# Altium PCB PCB.PcbDoc
Units mm, origin at the board's own origin, x right, y up, seen from the top; angles counter-clockwise.
Board outline 88.52 x 32.13 mm, 2 copper layers (Top Layer, Bottom Layer); 48 components, 54 nets, 209 pads, 13 vias.
Unrouted connection lines stored in the file: 85.
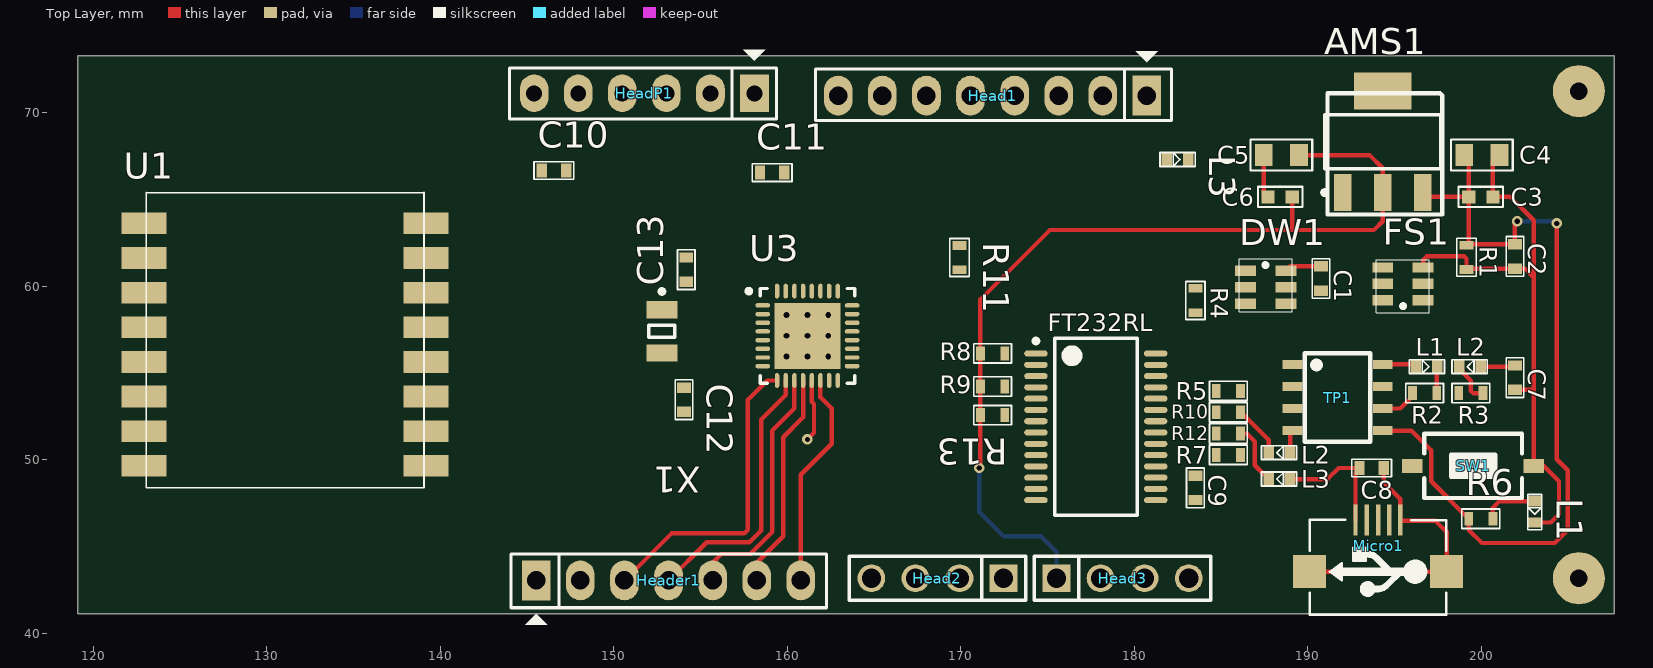
[diagram p0: Top Layer view]
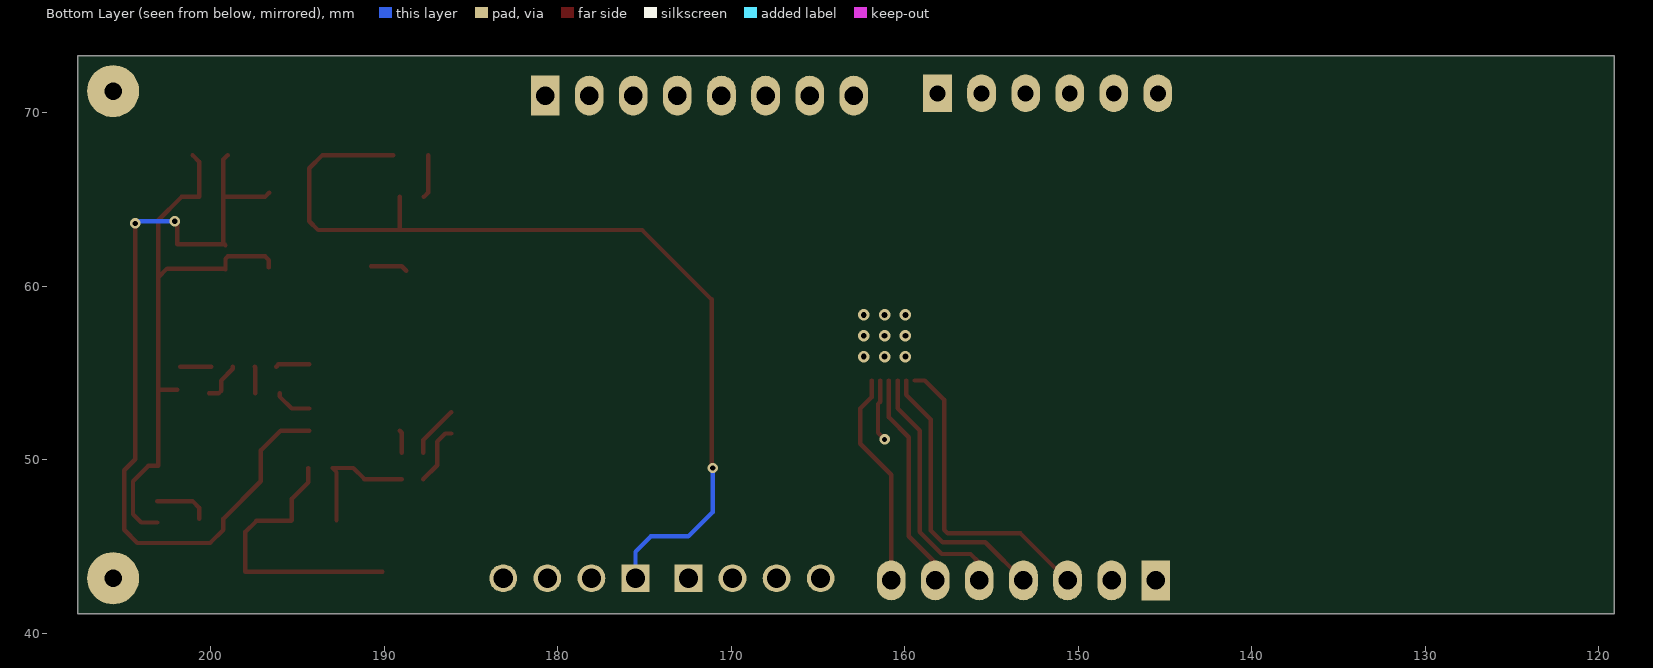
[diagram p1: Bottom Layer view, seen from below]

## Layer stack, top to bottom
Top Solder: solder mask 0.0102, Solder Resist, Dk 3.5
Top Layer: signal copper 0.0356
Dielectric 1: dielectric 0.32, FR-4, Dk 4.8
Bottom Layer: signal copper 0.0356
Bottom Solder: solder mask 0.0102, Solder Resist, Dk 3.5

## Board outline
119.126,41.148 207.645,41.148 207.645,73.279 119.126,73.279

## Design rules (kind name [scope] priority, off if disabled: settings)
Clearance [All] p1: gap=0.254 ignorepadtopadclearanceinfootprint=FALSE
PolygonConnect [All] p1: connectstyle=Relief reliefconductorwidth=0.254 reliefentries=4 polygonreliefangle="90 Angle" airgapwidth=0.254
RoomDefinition Schematic [InComponentClass('Schematic')] p1: confinementstyle=ConfineIn formatcopy=TRUE lockcomponents=FALSE outline 0,0 50.8,0 50.8,25.4 0,25.4
RoutingVias Via [All] p1: holewidth=0.3 width=0.6 viastyle="Through Hole" minholewidth=0.3 minwidth=0.6 maxholewidth=0.3 maxwidth=0.6
SolderMaskExpansion [All] p1: expansion=0.102
Width [All] p1: maxlimit=0.254 minlimit=0.254 preferedwidth=0.254
30 further rules are at their usual default settings.

## Components (designator, comment, footprint, x,y, rotation, side; value= is the part's Value field where it differs from the comment)
AMS1 "AMS1117 3.3V" AMS-1117 194.437,67.564 r0 top
Baterry1 "18650 Baterry" "18650 Baterry" 230.505,86.614 r270 bottom
C1 "100pF" "C104 0603 SMD" 190.754,60.452 r270 top
C2 "100pF" "C104 0603 SMD" 201.93,61.722 r90 top
C3 "2u2" 0603C-2U2 199.263,65.151 r0 top
C4 "2u2" 0805C-TBD 199.263,67.564 r0 top
C5 "2u2" 0805C-TBD 189.23,67.564 r180 top
C6 "2u2" 0603C-2U2 189.103,65.151 r180 top
C7 "100pF" "C104 0603 SMD" 201.93,54.737 r90 top
C8 "4.7uF" "C104 0603 SMD" 193.675,49.53 r0 top
C9 "4.7uF" "C104 0603 SMD" 183.515,48.387 r90 top
C10 "0.1uF" "C104 0603 SMD" 146.558,66.675 r0 top
C11 "0.1uF" "C104 0603 SMD" 159.131,66.548 r0 top
C12 "100pF" "C104 0603 SMD" 154.051,53.467 r270 top
C13 "100pF" "C104 0603 SMD" 154.178,60.96 r90 top
DW1 "DW01A" SOT23-6L 187.579,60.198 r0 top
FS1 "FS8250A" SOT23-6L 195.46,59.887 r180 top
FT232RL "FT232RL" TSSOP28 177.779,51.902 r0 top
Head1 "JP8 PIN" JP8 180.721,70.993 r180 top value=JP7
Head2 "JP4" JP4-D1T 172.466,43.18 r180 top
Head3 "JP4" JP4-D1T 175.514,43.18 r0 top
Header1 "JP7 PIN" JP7 145.542,43.053 r0 top value=JP7
HeadP1 "JP6 PIN" JP6 158.115,71.12 r180 top value=JP7
L1 "Red" "LED 0603 SMD" 203.073,46.99 r270 top
L1 "Red" "LED 0603 SMD" 196.85,55.372 r0 top
L2 "Red" "LED 0603 SMD" 188.341,50.419 r180 top
L2 "Red" "LED 0603 SMD" 199.314,55.372 r180 top
L3 "Red" "LED 0603 SMD" 188.341,48.895 r180 top
L3 "Red" "LED 0603 SMD" 182.499,67.31 r0 top
Micro1 "USB-5" USB-M1 194.043,46.529 r180 top
R1 "0.1K" "SMD 0603 Res" 199.136,61.671 r270 top
R2 "1K" "SMD 0603 Res" 196.723,53.848 r0 top
R3 "1K" "SMD 0603 Res" 199.39,53.848 r0 top
R4 "1K" "SMD 0603 Res" 183.515,59.182 r270 top
R5 "1.3K" "SMD 0603 Res" 185.42,53.975 r0 top
R6 "0.51k" "SMD 0603 Res" 199.96,46.609 r0 top
R7 "0.22k" "SMD 0603 Res" 185.42,50.292 r180 top
R8 "10K" "SMD 0603 Res" 171.831,56.134 r180 top
R9 "10K" "SMD 0603 Res" 171.831,54.229 r180 top
R10 "0.51K" "SMD 0603 Res" 185.42,52.747 r180 top
R11 "1K" "SMD 0603 Res" 169.926,61.657 r270 top
R12 "0.51K" "SMD 0603 Res" 185.42,51.52 r180 top
R13 "10K" "SMD 0603 Res" 171.831,52.578 r180 top
SW1 "SW" SW1-SMD 199.517,49.657 r180 top value="SW chip 2 pin"
TP1 "TP4056" TP4056-SOP8 189.103,50.419 r270 top
U1 "Lora Ra-02" Ra-02 131.064,56.896 r0 top
U3 "ATmega328-AU" QFN32 161.163,57.15 r0 top
X1 "8Mhz" XT2-32.768KHz-2_V 152.781,57.404 r270 top value=4Mhz

## Footprints (in the part's own frame and the unit in brackets; to place one, negate y for a bottom-side part, rotate by r counter-clockwise, add the part's x,y. Pads: shape width x height; smd on the part's side, far side on the other; paste and mask are expansions set on the pad)
0603C-2U2 [mil] "CAPACITOR 0603"
  rect 30x30 smd: 1(0,0) 2(55,0)
  silkscreen extent -23,-23 78,23, body extent -4,-15 59,15, height 19
0805C-TBD [mil] "CAPACITOR 0805"
  rect 40x50 smd: 1(-10,0) 2(70,0)
  silkscreen extent -40,-35 100,35, body extent -11,-25 70,25, height 26
"18650 Baterry" [mm]
  rect 8x6 smd: 1(-0.254,10.287) 2(76.962,10.287)
  silkscreen extent -4.32,0 81.03,20.7, body extent 0,0 77.05,20.65, height 14.86
AMS-1117 [mm]
  rect 1x2.15 smd: 1(-2.427,-2.163) 2(-0.127,-2.163) 3(2.173,-2.163)
  rect 3.3x2.15 smd: 4(-0.127,3.687)
  silkscreen extent -3.6,-3.43 3.3,3.56, body extent -3.37,-2.74 3.19,4.26, height 2.04
"C104 0603 SMD" [mm]
  rect 0.6x0.8 smd: 1(-0.7,0) 2(0.7,0)
  silkscreen extent -1.14,-0.51 1.14,0.51, body extent -0.8,-0.4 0.8,0.4
JP4-D1T [mm] "4 pins, 1 row, straight, gold plating"
  rect 1.6x1.6 hole 1.1: 1(0,0)
  round 1.6 hole 1.1: 2(2.54,0) 3(5.08,0) 4(7.62,0)
  silkscreen extent -1.27,-1.27 8.89,1.27, body extent -1.27,-1.27 8.89,1.27, height 8.54
JP6 [mil] "JP6"
  rect 65x85 hole 36: 1(0,0)
  oval 65x85 hole 36: 2(100,0) 3(200,0) 4(300,0) 5(400,0) 6(500,0)
  silkscreen extent -50,-99 556,58, body extent -48,-50 548,48, height 323
JP7 [mil] "JP7"
  rect 65x90 hole 42: 1(0,0)
  oval 65x90 hole 42: 2(100,0) 3(200,0) 4(300,0) 5(400,0) 6(500,0) 7(600,0)
  silkscreen extent -57,-100 658,60, body extent -50,-49 646,49, height 323
JP8 [mil] "JP8"
  rect 65x90 hole 42: 1(0,0)
  oval 65x90 hole 42: 2(100,0) 3(200,0) 4(300,0) 5(400,0) 6(500,0) 7(600,0) 8(700,0)
  silkscreen extent -56,-100 752,57, body extent -48,-50 748,48, height 323
"LED 0603 SMD" [mm]
  rect 0.6x0.8 smd: 1(-0.635,0) 2(0.6,0)
  silkscreen extent -1.02,-0.4 1.02,0.4, body extent -0.67,-0.4 0.93,0.4, height 0.6
QFN32 [mm] "QFN, 32-Leads, Body 5x5 mm, Pitch 0.5mm, IPC High Density"
  oval 0.85x0.254 smd: 1(-2.575,1.75) 2(-2.575,1.25) 3(-2.575,0.75) 4(-2.575,0.25) 5(-2.575,-0.25) 6(-2.575,-0.75) 7(-2.575,-1.25) 8(-2.575,-1.75) 17(2.575,-1.75) 18(2.575,-1.25) 19(2.575,-0.75) 20(2.575,-0.25) 21(2.575,0.25) 22(2.575,0.75) 23(2.575,1.25) 24(2.575,1.75)
  oval 0.254x0.85 smd: 9(-1.75,-2.575) 10(-1.25,-2.575) 11(-0.75,-2.575) 12(-0.25,-2.575) 13(0.25,-2.575) 14(0.75,-2.575) 15(1.25,-2.575) 16(1.75,-2.575) 25(1.75,2.575) 26(1.25,2.575) 27(0.75,2.575) 28(0.25,2.575) 29(-0.25,2.575) 30(-0.75,2.575) 31(-1.25,2.575) 32(-1.75,2.575)
  rect 3.8x3.8 smd: 33(0,0)
  silkscreen extent -3.5,-2.73 2.73,2.73, body extent -2.76,-2.85 2.74,2.75, height 1.15
Ra-02 [mm]
  rect 2.6x1.25 smd: 1(-8.128,6.731) 2(-8.128,4.735) 3(-8.128,2.74) 4(-8.128,0.744) 5(-8.128,-1.252) 6(-8.128,-3.248) 7(-8.128,-5.243) 8(-8.128,-7.239) 9(8.128,-7.239) 10(8.128,-5.243) 11(8.128,-3.248) 12(8.128,-1.252) 13(8.128,0.744) 14(8.128,2.74) 15(8.128,4.735) 16(8.128,6.731)
  silkscreen extent -8,-8.51 8,8.51, body extent -8,-8.76 8,8.24, height 3.2
"SMD 0603 Res" [mm]
  rect 0.5x0.8 smd: 1(0.7,0) 2(-0.7,0)
  silkscreen extent -1.09,-0.56 1.09,0.56, body extent -0.8,-0.43 0.8,0.43, height 0.48
SOT23-6L [mm]
  rect 1.2x0.6 smd: 1(-1.175,0.7) 2(-1.175,-0.254) 3(-1.175,-1.2) 4(1.15,-1.2) 5(1.15,-0.254) 6(1.15,0.7)
  silkscreen extent -1.52,-1.65 1.52,1.4, body extent -1.5,-1.78 1.5,1.27, height 1.3
SW1-SMD [mm]
  rect 1.2x0.8 smd: 1(-3.5,0) 2(3.5,0)
  silkscreen extent -2.82,-1.85 2.82,1.85, body extent -3.05,-1.85 3.05,1.85, height 2.5
TP4056-SOP8 [mil]
  rect 20x45 smd: 1(-200,0) 2(-150,0) 3(-100,0) 4(-50,0) 5(-50,205) 6(-100,205) 7(-150,205) 8(-200,205)
  silkscreen extent -225,28 -25,177, body extent -223,-15 -30,221, height 61
TSSOP28 [mm] "TSSOP, 28-Leads, Body 10.20x5.30mm, Pitch 0.65mm, IPC High Density"
  oval 1.35x0.35 smd: 1(-3.45,4.225) 2(-3.45,3.575) 3(-3.45,2.925) 4(-3.45,2.275) 5(-3.45,1.625) 6(-3.45,0.975) 7(-3.45,0.325) 8(-3.45,-0.325) 9(-3.45,-0.975) 10(-3.45,-1.625) 11(-3.45,-2.275) 12(-3.45,-2.925) 13(-3.45,-3.575) 14(-3.45,-4.225) 15(3.45,-4.225) 16(3.45,-3.575) 17(3.45,-2.925) 18(3.45,-2.275) 19(3.45,-1.625) 20(3.45,-0.975) 21(3.45,-0.325) 22(3.45,0.325) 23(3.45,0.975) 24(3.45,1.625) 25(3.45,2.275) 26(3.45,2.925) 27(3.45,3.575) 28(3.45,4.225)
  silkscreen extent -3.57,-5.1 2.37,5.1, body extent -3.88,-5.16 3.88,5.17, height 2.15
USB-M1 [mil]
  rect 10x70 smd: 1(51.18,0) 2(25.59,0) 3(0,0) 4(-25.59,0) 5(-50,0)
  rect 74.8x74.8 smd: 5(-155.51,116.84) 5(155.51,116.84)
  silkscreen extent -155,-1 155,215, body extent -157,5 158,218, height 107
XT2-32.768KHz-2_V [mm] "Hand Drawn, 2-Leads, Body 3.2x1.5mm, Pitch 2.5mm"
  rect 1x1.8 smd: 1(-1.25,0) 2(1.25,0)
  silkscreen extent -2.43,-0.75 0.35,0.75, body extent -1.6,-0.75 1.6,0.75, height 0.9

## Part data
C1 C2 C7 C8 C9 C10 C11 C12 C13: library part "C104 SMD", "0603 SMD CAP"
C3 C6: library part 0603C-2U2-10V-X5R-TDK, "CAPACITOR 0603 CERAMIC", Manufacturer="TDK Corporation", Manufacturer Part Number=C1608X5R1A225K, Supplier Part Number 1=445-5166-2-ND, Reel=C11, Supplier 1=Digi-Key
C4 C5: library part 0603C-2U2-6V3-X5R-PAN, "CAPACITOR 0805 CERAMIC", Manufacturer="Panasonic - ECG", Manufacturer Part Number=ECJ-1VB0J225K, Supplier Part Number 1=PCC2273TR-ND, Supplier 1=Digi-Key
FT232RL: "USB TO UART INTERFACE", Manufacturer="FTDI, Future Technology Devices International Ltd", Manufacturer Part Number="FT232RL R", Package / Case=28-SSOP, Supplier Part Number=768-1007-2-ND, Voltage="3.3 V ~ 5.25 V", Category="Integrated Circuits (ICs)", Features="Serial Interface", FIFO's="256 Byte", Number of Channels=8, Packaging="Tape & Reel (TR)", RoHS="RoHS Compliant", Supplier=Digi-Key, Supplier 1=Digi-Key, Supplier Part Number 1=768-1007-2-ND
Head1: library part JP8
Head2 Head3: "WR-PHD 2.54 mm Angled Socket Header", Manufacturer="Würth Elektronik eiSos GmbH", partNo=613004143121, ComponentLink1 Description=Manufacturer, ComponentLink1URL=http://www.we-online.com, ComponentLink2 Description=Datasheet, ComponentLink2URL=http://katalog.we-online.de/em/datasheet/6130xx143121.pdf, Created by="Karrer Zheng", Created Date="29 March 2013", NoPins=04
Header1: library part JP7_1
HeadP1: library part JP6
L1 L1 L2 L2 L3 L3: library part "0603 SMD LED"
Micro1: Manufacturer=FCI, Manufacturer Part Number=10118193-0001LF, Supplier Part Number 1=609-4616-1-ND, .Checked PCB=RF, .Checked SCH=MM, .Creator=MM, Category="Connectors, Interconnects", ComponentLink1Description=http://portal.fciconnect.com/Comergent//fci/drawing/10118193.pdf, ComponentLink1URL=http://portal.fciconnect.com/Comergent//fci/drawing/10118193.pdf, Connector Type="USB - micro B", Features="Shielded, Solder Retention", Gender=Receptacle, Ingress Protection=-, Mounting Type="Surface Mount, Right Angle, Horizontal", Number of Contacts=5, Packaging="Cut Tape (CT)", Pricing 1="1=0.46, 10=0.433, 25=0.3712, 50=0.3156, 100=0.3032, 250=0.27224, 500=0.25988 (USD)", RoHS="RoHS Compliant", Specifications="USB 2.0", Stock 1=28642, Supplier 1=Digi-Key
R1 R2 R3 R4 R5 R6 R7 R8 R9 R10 R11 R12 R13: library part "0603 Res"
SW1: library part SW2, "Switch button 2 pin"
U3: "8-bit AVR Microcontroller, 32KB Flash, 1KB EEPROM, 2KB SRAM, 32-pin TQFP, Industrial Grade (-40癈 to 85癈)", Supplier Part Number 1=ATMEGA328-AU-ND, Code_JEDEC=MS-026-ABA, ComponentLink1Description="Manufacturer Link", ComponentLink1URL=http://www.atmel.com/products/avr/default.asp?, ComponentLink2Description="ATmega48A/48PA/88A/88PA/168A/168PA/328/328P Datasheet", ComponentLink2URL=http://www.atmel.com/dyn/resources/prod_documents/8271.pdf, ComponentLink3Description="ATmega48A/48PA/88A/88PA/168A/168PA/328/328P Summary", ComponentLink3URL=http://www.atmel.com/dyn/resources/prod_documents/8271S.pdf, ComponentLink4Description="Atmel.com Home", ComponentLink4URL=http://www.atmel.com, DatasheetVersion="revA, Jan-2010", PackageDescription="32-Lead, 7x7x1.0 mm Body, 0.8mm Lead Pitch, Thin Profile Plastic Quad Flat Package (TQFP)", PackageReference=32A, PackageVersion="revB, Oct-2001", Published=1-Apr-2010, Publisher="Altium Limited", Supplier 1=Digi-Key, Supplier 2=Mouser, Supplier Part Number 2=556-ATMEGA328-AU
X1: library part XT2, "Crystal, 32.768 KHz, -40 to 85 degC, 3.2 x 1.5 x 0.9 mm SMD"

## Free pads (board coordinates)
  round 3 hole 1: PAD(205.613,43.18) PAD(205.613,71.247)

## Via types
v1: diameter 0.66, hole 0.33, Top Layer to Bottom Layer, tented top, 9 vias
v2: diameter 0.6, hole 0.3, Top Layer to Bottom Layer, 4 vias

## Nets (pads, with @x,y where several pads share a name; then routed paths per layer and width w, separated by ;. In a path a pad name is that pad's centre, name@x,y a point inside that pad or via, vN(x,y) a via of type N, cw(c..) or ccw(c..) an arc to the next point about the centre after c; other vN are vias at no path point)
3.3V: AMS1.2 C5.1 C6.1 Head3.1 Head3.2 Head3.3 Head3.4 R8.1 R9.1 R13.1 U1.3 U3.4 U3.6 U3.18 | length 54.3
  Top Layer w0.254: v2(171.069,49.53) 171.131,49.592 R13.1 R9.1 R8.1 171.131,59.244 175.133,63.246 189.103,63.246 ; C6.1 189.103,63.246 ; C5.1 193.548,67.564 194.31,66.802 AMS1.2 194.31,63.754 193.802,63.246 189.103,63.246
  Bottom Layer w0.254: v2(171.069,49.53) 171.069,46.99 172.466,45.593 174.625,45.593 175.514,44.704 Head3.1
5V+B: C7.2 C8.1 L1.1@196.215,55.372 L2.1 L3.1@188.976,48.895 Micro1.1 R7.2 TP1.4 TP1.8 | length 12.4
  Top Layer w0.254: L3.1@188.976,48.895 191.135,48.895 191.77,49.53 C8.1 192.743,49.298 Micro1.1 ; L2.1@188.976,50.419 188.976,51.562 TP1.4 ; TP1.8 196.088,55.499 L1.1@196.215,55.372 ; L2.1@199.949,55.372 C7.2@201.741,55.372
A0: Head1.1 U3.23
A1: Head1.2 U3.24
A2: Head1.3 U3.25
A3: Head1.4 U3.26
A4: Head1.5 U3.27
A5: Head1.6 U3.28
A6: Head1.7 U3.19
A7: Head1.8 U3.22
ARCF: C11.2 U3.20
B+: AMS1.3 Baterry1.1 C2.2 C3.1 C4.1 R1.2 R6.2 TP1.5 | length 47.6
  Top Layer w0.254: TP1.5 195.961,51.689 197.104,50.546 197.104,48.765 R6.2 199.26,45.977 200.025,45.212 204.216,45.212 204.978,45.974 204.978,49.403 204.343,50.038 v2(204.343,63.627) ; AMS1.3 196.86,65.151 C3.1 ; C4.1 199.263,67.31 C3.1 ; R1.2 R1.2@199.187,62.422 ; v2(202.057,63.754) 201.93,63.627 C2.2 R1.2@199.187,62.422 ; R1.2@199.187,62.422 199.263,62.498 C3.1
  Bottom Layer w0.254: v2(202.057,63.754) 204.216,63.754 v2(204.343,63.627)
B-: AMS1.1 Baterry1.2 C1.2 C2.1 C3.2 C4.2 C5.2 C6.2 C7.1 C8.2 C9.2 C11.1 C12.2 C13.2 DW1.5 FS1.1 FS1.3 FT232RL.7 FT232RL.18 FT232RL.21 FT232RL.25 FT232RL.26 Head2.1 Head2.2 Head2.3 Head2.4 HeadP1.1 HeadP1.2 L1.2@203.073,46.39 L3.2@183.099,67.31 Micro1.5 R1.1 R4.1 R5.2 SW1.1 TP1.1 TP1.3 U1.1 U1.2 U1.9 U1.15 U1.16 U3.3 U3.5 U3.21 | length 52.9
  Top Layer w0.254: C5.2 187.452,65.405 C6.2 ; Micro1.5@190.093,43.561 197.993,43.561 197.993,45.847 197.358,46.482 195.36,46.482 195.313,46.529 195.313,47.765 194.375,48.703 C8.2 ; FS1.3 196.635,61.507 196.85,61.722 199.009,61.722 199.136,61.595 R1.1 199.187,61.022 C2.1 202.503,61.022 203.017,60.508 ; C4.2 200.66,67.183 C3.2 201.676,65.151 203.017,63.81 203.017,60.508 ; C7.1 202.952,54.037 203.017,54.102 ; L1.2@203.073,46.39 203.997,46.39 204.47,46.863 204.47,48.768 203.581,49.657 SW1.1 203.017,54.102 ; 203.017,54.102 203.017,60.508
D2: U1.5 U3.32
D3: Header1.1 U3.1
D4: Header1.2 U3.2
D5: Header1.3 U3.9 | length 18
  Top Layer w0.254: Header1.3 153.331,45.762 157.522,45.762 157.734,45.974 157.734,53.467 158.842,54.575 U3.9
D6: Header1.4 U3.10 | length 15.8
  Top Layer w0.254: Header1.4 155.363,45.254 157.819,45.254 158.496,45.93 158.496,52.324 159.913,53.741 U3.10
D7: Header1.5 R11.1 U3.11 | length 14.4
  Top Layer w0.254: Header1.5 155.702,44.069 156.21,44.577 157.861,44.577 159.131,45.847 159.131,51.689 160.413,52.971 U3.11
D8: Header1.6 U3.12 | length 12.6
  Top Layer w0.254: Header1.6 158.242,44.069 159.766,45.593 159.766,51.308 160.913,52.455 U3.12
D9: U1.4 U3.13 | length 3.6
  Top Layer w0.254: v2(161.163,51.181) 161.544,51.562 161.544,53.217 161.413,53.348 U3.13
D10: Header1.7 U3.14 | length 12.5
  Top Layer w0.254: Header1.7 160.782,49.149 162.56,50.927 162.56,52.959 161.913,53.606 U3.14
D+: FT232RL.15
D-: FT232RL.16
DRX: L3.2@187.741,48.895 R12.2 | length 3.5
  Top Layer w0.254: R12.2 186.478,51.52 186.944,51.054 186.944,49.692 L3.2@187.741,48.895
DTR: C10.2 HeadP1.6
DTX: L2.2@187.741,50.419 R10.2 | length 3
  Top Layer w0.254: R10.2 186.14,52.747 187.741,51.146 L2.2@187.741,50.419
M_RXD: FT232RL.5 R9.2
M_TXD: FT232RL.1 R8.2
MISO: U1.13 U3.16
MOSI: U1.14 U3.15
NetC1_1: C1.1 DW1.6 | length 2.1
  Top Layer w0.254: DW1.6 188.983,61.152 C1.1
NetC9_1: C9.1 FT232RL.17
NetC12_1: C12.1 U3.7 X1.2
NetC13_1: C13.1 U3.8 X1.1
NetDW1_1: DW1.1 FS1.4
NetDW1_2: DW1.2 R4.2
NetDW1_3: DW1.3
NetFT232RL_20: FT232RL.20 R7.1
NetFT232RL_22: FT232RL.22 R12.1
NetFT232RL_23: FT232RL.23 R10.1
NetL1_1: L1.1@203.073,47.625 R6.1 | length 3.2
  Top Layer w0.254: R6.1 200.66,47.244 201.041,47.625 L1.1@203.073,47.625
NetL1_2: L1.2@197.45,55.372 R2.1 | length 1.5
  Top Layer w0.254: R2.1 197.423,55.345 L1.2@197.45,55.372
NetL2_2: L2.2@198.714,55.372 R3.1 | length 2.4
  Top Layer w0.254: L2.2@198.714,55.372 198.714,55.246 199.39,54.57 199.39,53.975 199.517,53.848 R3.1
NetL3_1: L3.1@181.864,67.31 R11.2
NetR2_2: R2.2 TP1.6 | length 2.2
  Top Layer w0.254: TP1.6 195.326,52.959 196.023,53.656 R2.2
NetR3_2: R3.2 TP1.7
NetR5_1: R5.1 TP1.2
RESET: C10.1 R13.2 SW1.2 U3.29
RX1: HeadP1.4 U3.30
SCK: U1.12 U3.17
TX0: HeadP1.5 U3.31
VCC: HeadP1.3
VCC_IO: FT232RL.4
pads on no net: AMS1.4 DW1.4 FS1.2 FS1.5 FS1.6 FT232RL.2 FT232RL.3 FT232RL.6 FT232RL.8 FT232RL.9 FT232RL.10 FT232RL.11 FT232RL.12 FT232RL.13 FT232RL.14 FT232RL.19 FT232RL.24 FT232RL.27 FT232RL.28 Micro1.2 Micro1.3 Micro1.4 U1.6 U1.7 U1.8 U1.10 U1.11 U3.33
copper on no net:
  other v1: 159.963,55.95 161.163,55.95 162.363,55.95 159.963,57.15 161.163,57.15 162.363,57.15 159.963,58.35 161.163,58.35 162.363,58.35

## Silkscreen, mask and mechanical layers (free items; w line width, h text height)
Top Overlay:
  text "Easy Lora Node" at 110.109,71.628 h2 r270

## Text inside footprints (layer, text, board x,y; h text height)
Baterry1: Bottom Overlay "-" at 213.741,5.588 h4 r270; Bottom Overlay "+" at 213.36,87.249 h4 r270